# Altium PCB Tray3.PcbDoc
Units mil, origin at the board's own origin, x right, y up, seen from the top; angles counter-clockwise.
Board outline 4725 x 1180 mil, 2 copper layers (Top Layer, Bottom Layer); 2 components, 24 nets, 24 pads, 0 vias.
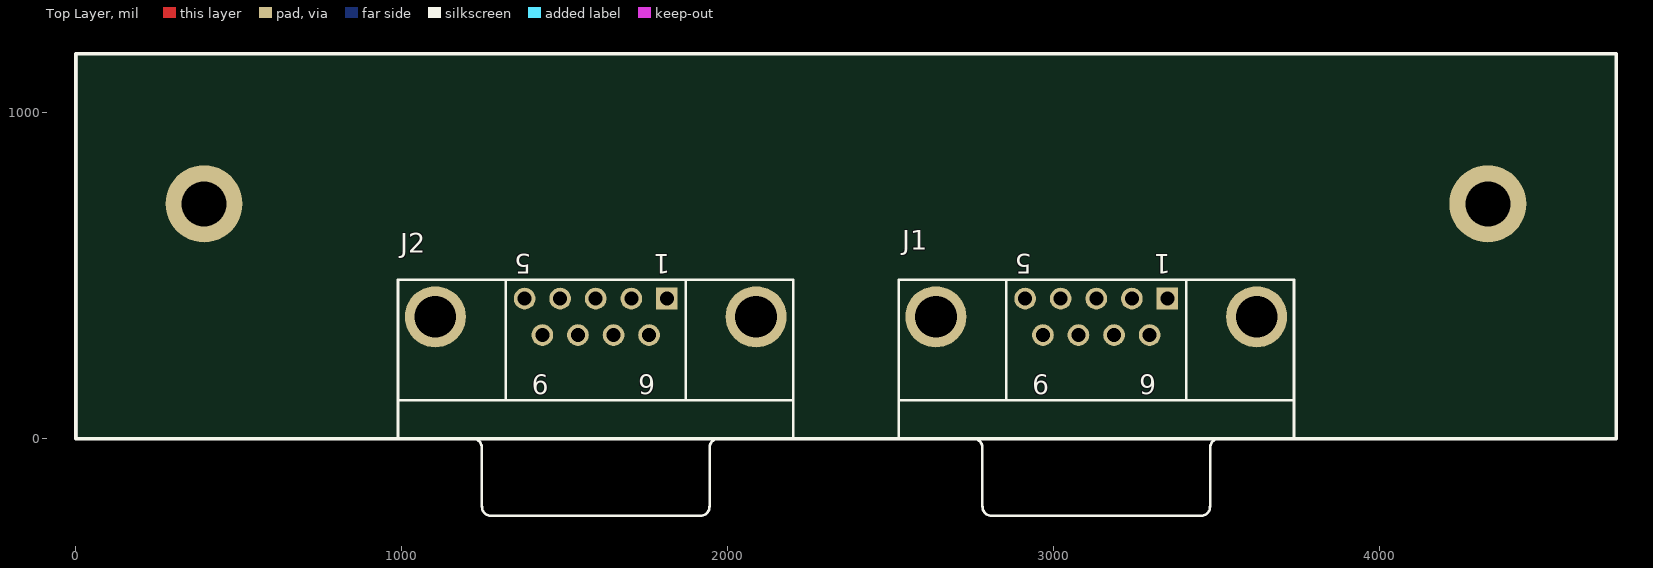
[diagram p0: Top Layer view]
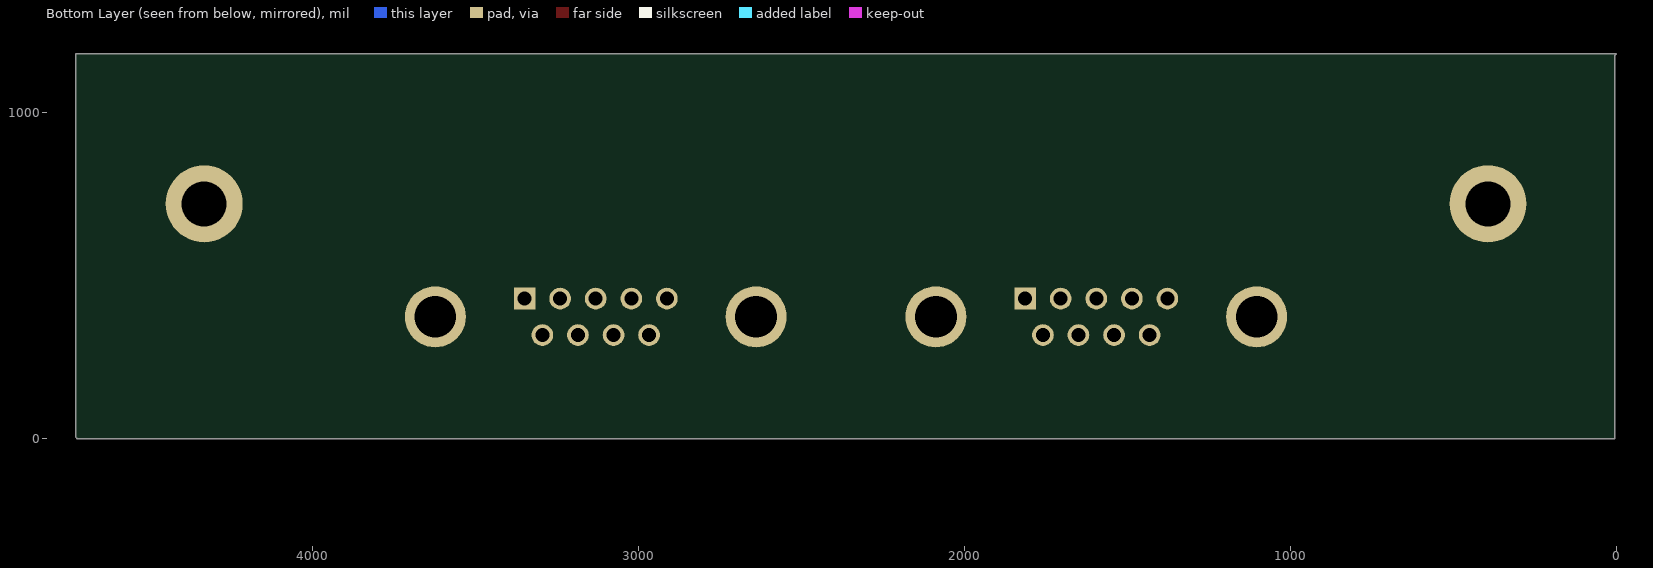
[diagram p1: Bottom Layer view, seen from below]

## Layer stack, top to bottom
Top Layer: signal copper 1.4
Dielectric: dielectric 12.6, FR-4, Dk 4.8
Bottom Layer: signal copper 1.4

## Board outline
0,1180 5,1175 5,0 4720,0 4725,5 4725,1180

## Design rules (kind name [scope] priority, off if disabled: settings)
Clearance [All] p1: gap=10
PolygonConnect [All] p1: connectstyle=Relief reliefconductorwidth=10 reliefentries=4 polygonreliefangle="90 Angle"
RoutingVias [All] p1: holewidth=28 width=50 viastyle="Through Hole" minholewidth=28 minwidth=50 maxholewidth=28 maxwidth=50
SilkscreenOverComponentPads [All] p1: minsilkscreentomaskgap=10
SolderMaskExpansion [All] p1: expansion=4
Width [All] p1: maxlimit=10 minlimit=10 preferedwidth=10
27 further rules are at their usual default settings.

## Components (designator, comment, footprint, x,y, rotation, side; value= is the part's Value field where it differs from the comment)
J1 "Comment" DSUB1.385-2H9 3130,0 r180 top locked
J2 "Comment" DSUB1.385-2H9 1595,0 r180 top locked

## Footprints (in the part's own frame and the unit in brackets; to place one, negate y for a bottom-side part, rotate by r counter-clockwise, add the part's x,y. Pads: shape width x height; smd on the part's side, far side on the other; paste and mask are expansions set on the pad)
DSUB1.385-2H9 [mm] "Connector; D Subminiature; 9 Position; Right Angle; Pitch 1.385 mm"
  rect 1.69x1.69 hole 1.09: 1(-5.54,-10.92)
  round 1.69 hole 1.09: 2(-2.77,-10.92) 3(0,-10.92) 4(2.77,-10.92) 5(5.54,-10.92) 6(-4.155,-8.08) 7(-1.385,-8.08) 8(1.385,-8.08) 9(4.155,-8.08)
  round 4.76 hole 3.26: 10(-12.495,-9.5) 11(12.495,-9.5)
  silkscreen extent -15.4,-12.4 15.4,6

## Free pads (board coordinates)
  round 236.22 hole 137.79 mask+4: MP0(393.7,720.47)
  round 236.22 hole 137.79: MP1(4330.7,720.47)

## Nets (pads, with @x,y where several pads share a name; then routed paths per layer and width w, separated by ;. In a path a pad name is that pad's centre, name@x,y a point inside that pad or via, vN(x,y) a via of type N, cw(c..) or ccw(c..) an arc to the next point about the centre after c; other vN are vias at no path point)
$Net0: 
$Net1: 
$Net2: 
$Net3: 
$Net4: 
$Net5: 
$Net6: 
$Net7: 
$Net8: 
$Net9: 
$Net10: 
$Net11: 
$Net12: 
$Net13: 
$Net14: 
$Net15: 
$Net16: 
$Net17: 
$Net18: 
$Net19: 
$Net20: 
$Net21: 
$Net22: 
$Net23: 
pads on no net: J1.1 J1.2 J1.3 J1.4 J1.5 J1.6 J1.7 J1.8 J1.9 J1.10 J1.11 J2.1 J2.2 J2.3 J2.4 J2.5 J2.6 J2.7 J2.8 J2.9 J2.10 J2.11

## Silkscreen, mask and mechanical layers (free items; w line width, h text height)
Top Overlay:
  lines w10: 0,0 0,1181.1 4724.41,1181.1 4724.41,0 0,0

## Text inside footprints (layer, text, board x,y; h text height)
J1: Top Overlay "6" at 3313.27,195.87 h59.06 r180; Top Overlay "9" at 2986.1,195.87 h59.06 r180; Top Overlay "5" at 2931.57,565.94 h59.06 r180; Top Overlay "1" at 3357.95,565.94 h59.06 r180
J2: Top Overlay "6" at 1778.27,195.87 h59.06 r180; Top Overlay "9" at 1451.1,195.87 h59.06 r180; Top Overlay "5" at 1396.57,565.94 h59.06 r180; Top Overlay "1" at 1822.95,565.94 h59.06 r180